# Altium PCB PCB.PcbDoc
Units mm, origin at the board's own origin, x right, y up, seen from the top; angles counter-clockwise.
Board outline 53 x 70 mm, 2 copper layers (Top Layer, Bottom Layer); 35 components, 28 nets, 144 pads, 30 vias.
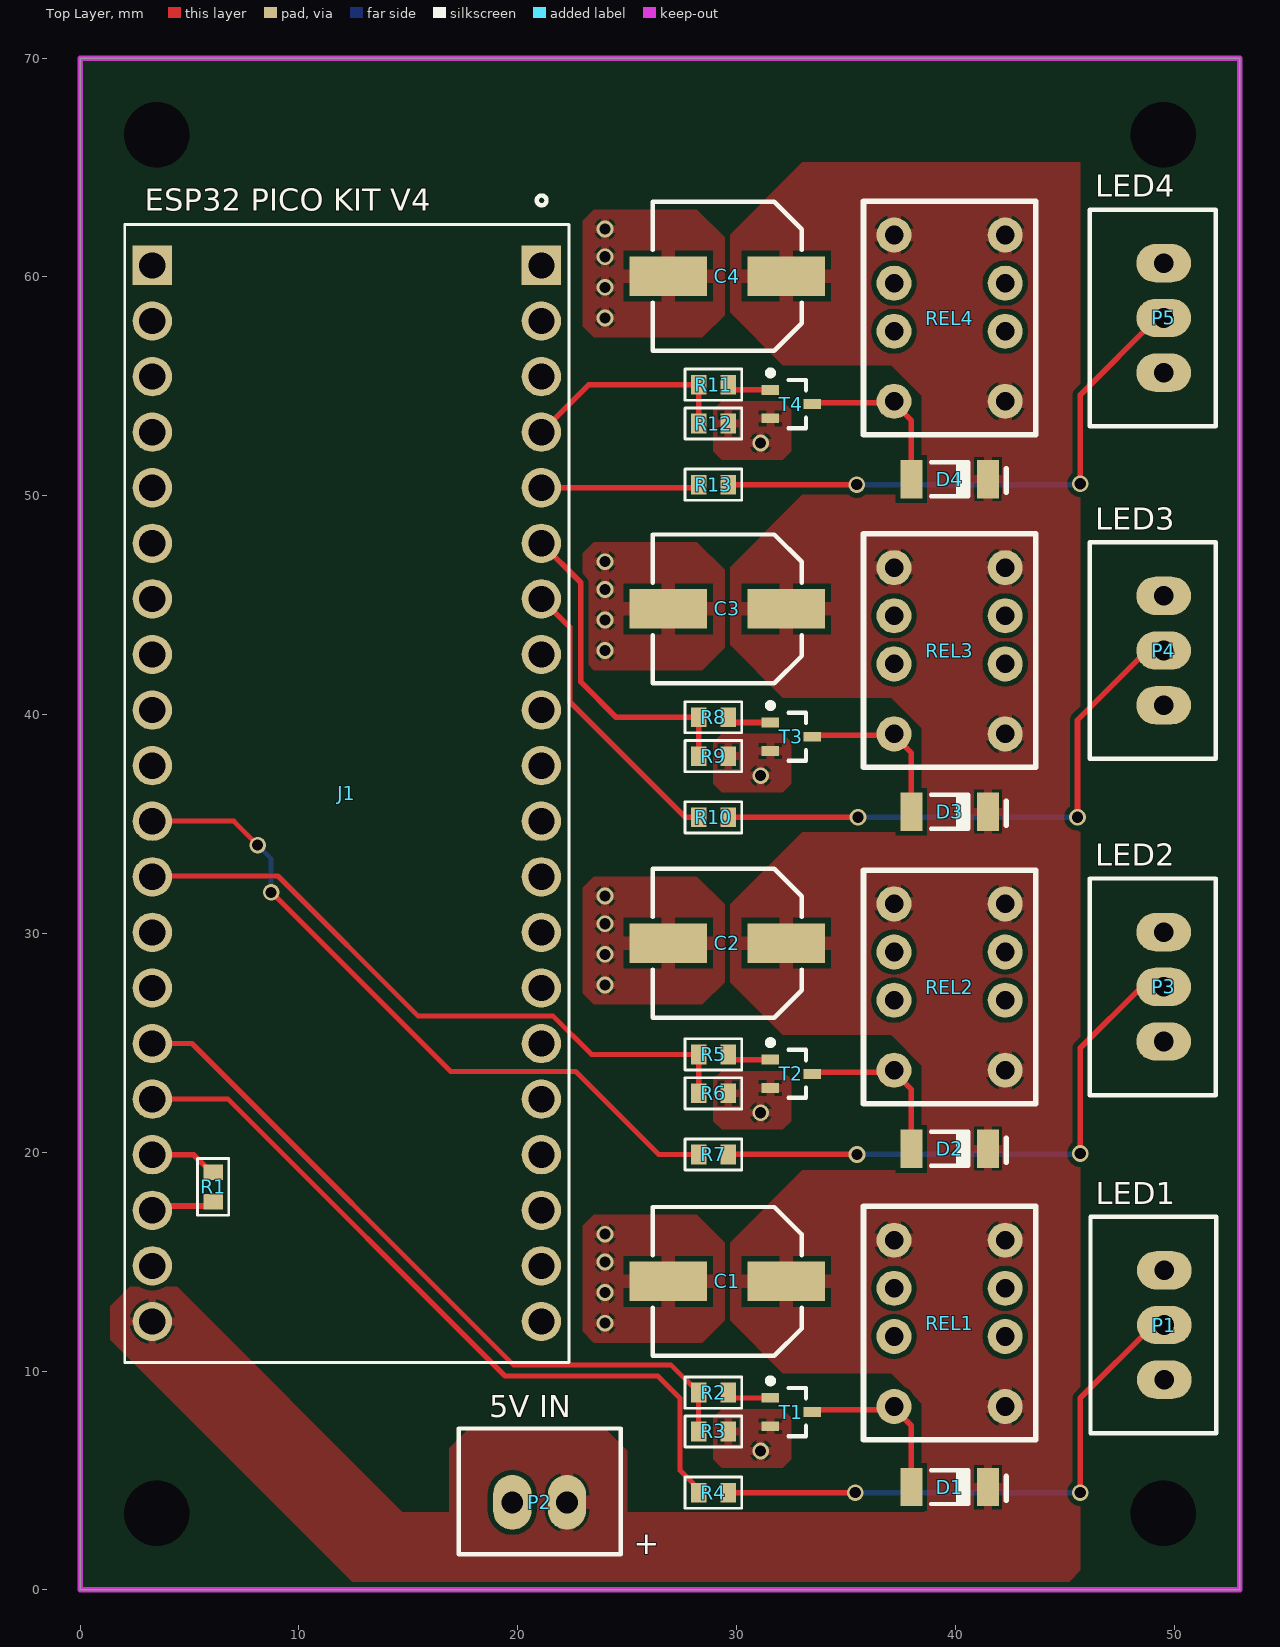
[diagram p0: Top Layer view]
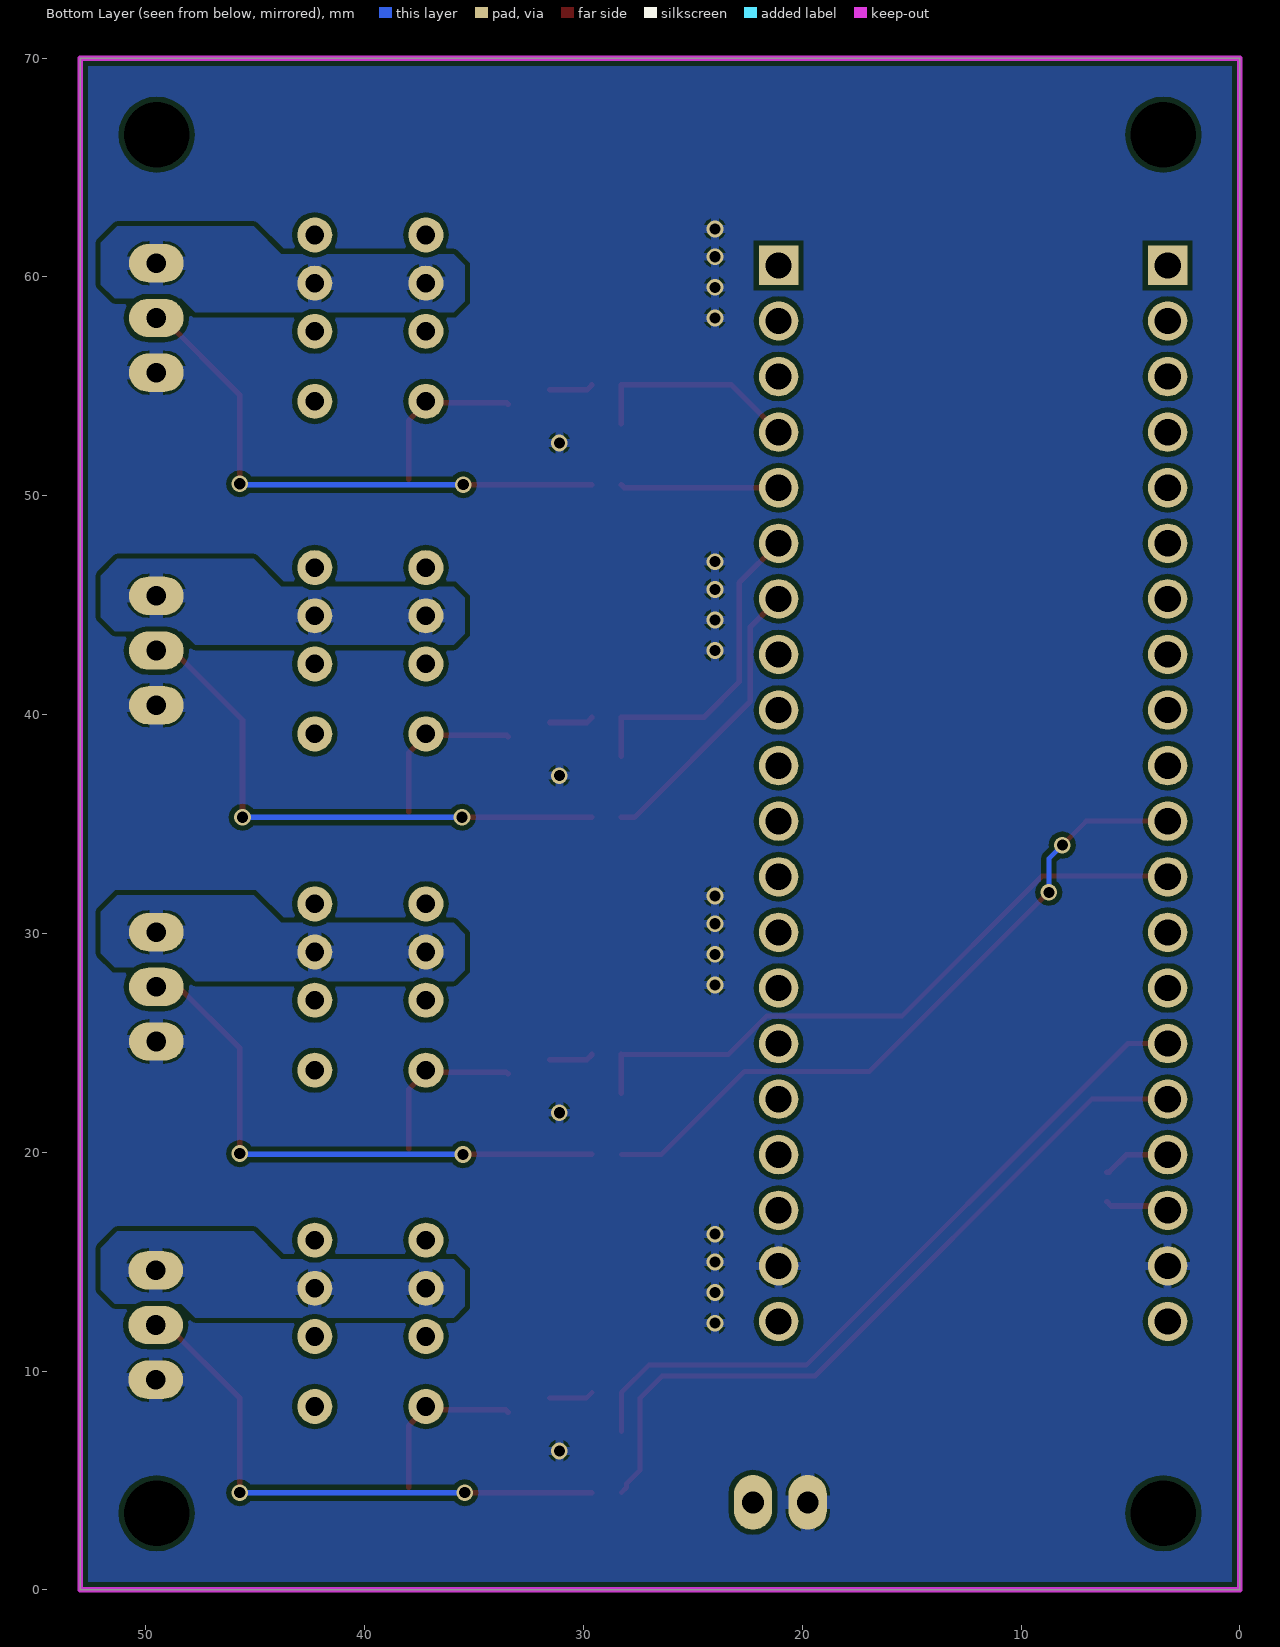
[diagram p1: Bottom Layer view, seen from below]

## Layer stack, top to bottom
Top Solder: solder mask 0.0102, Solder Resist, Dk 3.5
Top Layer: signal copper 0.0356
Dielectric 1: dielectric 0.32, FR-4, Dk 4.8
Bottom Layer: signal copper 0.0356
Bottom Solder: solder mask 0.0102, Solder Resist, Dk 3.5

## Board outline
0,0 0,70 53,70 53,0

## Design rules (kind name [scope] priority, off if disabled: settings)
BoardOutlineClearance [All] p1: gap=0.2 ignorepadtopadclearanceinfootprint=FALSE except(0.4: Arc-SplitBarrior Arc-SplitContinuation Track-SplitBarrior Track-SplitContinuation SMDPad-SplitBarrior SMDPad-SplitContinuation THPad-SplitBarrior THPad-SplitContinuation Via-SplitBarrior Via-SplitContinuation Fill-SplitBarrior Fill-SplitContinuation Poly-SplitBarrior Poly-SplitContinuation Region-SplitBarrior Region-SplitContinuation Text-SplitBarrior Text-SplitContinuation)
Clearance "Clearance Bottom Layer" [OnLayer('Bottom Layer')] p1: gap=0.203 ignorepadtopadclearanceinfootprint=TRUE except(0.254: Arc-Text Track-Text SMDPad-Text THPad-Text Via-Text Fill-Text Poly-Text Region-Text Text-Text)
Clearance "Clearance Top Layer" [OnLayer('Top Layer')] p2: gap=0.203 ignorepadtopadclearanceinfootprint=TRUE except(0.254: Arc-Text Track-Text SMDPad-Text THPad-Text Via-Text Fill-Text Poly-Text Region-Text Text-Text)
Clearance [All] p3: gap=0.2 ignorepadtopadclearanceinfootprint=FALSE except(0.089: Arc-Arc Arc-Track Arc-SMDPad Track-Track Track-SMDPad SMDPad-SMDPad; 0.127: Arc-Via Track-Via SMDPad-Via THPad-Via Via-Via; 0.254: Arc-Text Track-Text SMDPad-Text THPad-Text Via-Text Fill-Text Poly-Text Region-Text Text-Text)
HoleSize [All] p1: absolutevalues=TRUE maxlimit=6.3 minlimit=0.2 maxpercent=80.000 minpercent=20.000
MinimumAnnularRing [All] p1: minimumring=0.076
MinimumSolderMaskSliver [All] p1: minsoldermaskwidth=0.1
PolygonConnect PolygonConnect_1 [All] p1: thpad.connectstyle=Relief thpad.reliefconductorwidth=0.508 thpad.reliefentries=4 thpad.polygonreliefangle="90 Angle" thpad.airgapwidth=0.254 smdpad.connectstyle=Relief smdpad.reliefconductorwidth=0.508 smdpad.reliefentries=4 smdpad.polygonreliefangle="90 Angle" smdpad.airgapwidth=0.254 via.connectstyle=Direct via.reliefconductorwidth=0.508 via.reliefentries=4 via.polygonreliefangle="90 Angle" via.airgapwidth=0.254
RoutingCorners [All] p1: cornerstyle=Round minsetback=2.54 maxsetback=2.54
RoutingVias [All] p1: holewidth=0.5 width=1 viastyle="Through Hole" minholewidth=0.2 minwidth=0.45 maxholewidth=1 maxwidth=2
SilkToSilkClearance [All] p1: silktosilkclearance=0.1
SilkToSolderMaskClearance [IsPad] p1: minsilkscreentomaskgap=0.1 clearancetoexposedcopper=TRUE
SolderMaskExpansion [All] p1: expansion=0.102 istentingtop=FALSE
Width [All] p1: maxlimit=2.54 minlimit=0.089 preferedwidth=0.381
25 further rules are at their usual default settings.

## Components (designator, comment, footprint, x,y, rotation, side; value= is the part's Value field where it differs from the comment)
C1 "100uF" EM-Alu-Elco_6,3X8_SMD 29.576,14.097 r0 top
C2 "100uF" EM-Alu-Elco_6,3X8_SMD 29.576,29.551 r0 top
C3 "100uF" EM-Alu-Elco_6,3X8_SMD 29.576,44.831 r0 top
C4 "100uF" EM-Alu-Elco_6,3X8_SMD 29.576,60.031 r0 top
D1 "1N4148" "EM-SOD80C T1,5_SMD" 39.736,4.699 r180 top
D2 "1N4148" "EM-SOD80C T1,5_SMD" 39.736,20.153 r180 top
D3 "1N4148" "EM-SOD80C T1,5_SMD" 39.736,35.56 r180 top
D4 "1N4148" "EM-SOD80C T1,5_SMD" 39.736,50.76 r180 top
J1 "ESP32-PICO-KIT" XCVR_ESP32-PICO-KIT 12.191,36.397 r270 top
P1 "Pin Header 1X3P" "JST XH B3B-XH-A" 49.548,12.105 r270 top value="Pin Header 1x3P"
P2 "Pin Header 1X2P" "JST XH B2B-XH-A" 21,4 r180 top value="Pin Header 1x2P"
P3 "Pin Header 1X3P" "JST XH B3B-XH-A" 49.515,27.559 r270 top value="Pin Header 1x3P"
P4 "Pin Header 1X3P" "JST XH B3B-XH-A" 49.515,42.926 r270 top value="Pin Header 1x3P"
P5 "Pin Header 1X3P" "JST XH B3B-XH-A" 49.515,58.126 r270 top value="Pin Header 1x3P"
R1 "10K" "EM-0603-R T0,45_SMD" 6.081,18.415 r270 top
R2 "2K2" "EM-0603-R T0,45_SMD" 28.941,9.017 r0 top
R3 "22K" "EM-0603-R T0,45_SMD" 28.941,7.239 r0 top
R4 "470R" "EM-0603-R T0,45_SMD" 28.941,4.445 r0 top
R5 "2K2" "EM-0603-R T0,45_SMD" 28.941,24.471 r0 top
R6 "22K" "EM-0603-R T0,45_SMD" 28.941,22.693 r0 top
R7 "470R" "EM-0603-R T0,45_SMD" 28.941,19.899 r0 top
R8 "2K2" "EM-0603-R T0,45_SMD" 28.941,39.878 r0 top
R9 "22K" "EM-0603-R T0,45_SMD" 28.941,38.1 r0 top
R10 "470R" "EM-0603-R T0,45_SMD" 28.941,35.306 r0 top
R11 "2K2" "EM-0603-R T0,45_SMD" 28.941,55.078 r0 top
R12 "22K" "EM-0603-R T0,45_SMD" 28.941,53.3 r0 top
R13 "470R" "EM-0603-R T0,45_SMD" 28.941,50.506 r0 top
REL1 "AGQ2004H" "THC Relay AGQ" 39.736,12.192 r90 top
REL2 "AGQ2004H" "THC Relay AGQ" 39.736,27.559 r90 top
REL3 "AGQ2004H" "THC Relay AGQ" 39.736,42.926 r90 top
REL4 "AGQ2004H" "THC Relay AGQ" 39.736,58.126 r90 top
T1 "BC817" EM-SOT323_SMD 32.497,8.128 r0 top
T2 "BC817" EM-SOT323_SMD 32.497,23.582 r0 top
T3 "BC817" EM-SOT323_SMD 32.497,38.989 r0 top
T4 "BC817" EM-SOT323_SMD 32.497,54.189 r0 top

## Footprints (in the part's own frame and the unit in brackets; to place one, negate y for a bottom-side part, rotate by r counter-clockwise, add the part's x,y. Pads: shape width x height; smd on the part's side, far side on the other; paste and mask are expansions set on the pad)
"EM-0603-R T0,45_SMD" [mm] "Chip Resistor, 2-Leads, Body 1,55x0,85mm, IPC Medium Density"
  rect 0.7x0.9 smd: 1(-0.675,0) 2(0.675,0)
  silkscreen extent -1.3,-0.71 1.3,0.71, body extent -0.77,-0.43 0.77,0.43, height 0.45
EM-Alu-Elco_6,3X8_SMD [mm] "Aluminum Electrolytic Capacitor, Body 6,60x6,60x7,70mm, IPC Low Density"
  rect 3.55x1.8 smd: 1(2.7,0) 2(-2.7,0)
  silkscreen extent -3.4,-3.4 3.4,3.4, body extent -3.65,-3.4 3.65,3.4, height 7.7
"EM-SOD80C T1,5_SMD" [mm] "MELF Diode, 2-Leads, Body 3,50x1,53mm, IPC Medium Density"
  rect 1x1.75 smd: 1(-1.75,0) 2(1.75,0)
  silkscreen extent -2.59,-0.77 0.85,0.78, body extent -1.75,-0.76 1.75,0.76, height 1.53
EM-SOT323_SMD [mm] "SOTFL, 3-Leads, Body 2,00x2,10mm, Pitch 0,65mm, IPC Medium Density"
  rect 0.8x0.45 smd: 1(-0.95,0.65) 2(-0.95,-0.65) 3(0.95,0)
  silkscreen extent -1.07,-1.1 0.67,1.55, body extent -1.05,-1.1 1.05,1.1, height 1.1
"JST XH B2B-XH-A" [mm]
  oval 1.75x2.5 hole 1: 1(-1.25,0) 2(1.25,0)
  silkscreen extent -3.7,-3.38 3.7,2.38, body extent -3.7,-3.38 3.7,2.38, height 7
"JST XH B3B-XH-A" [mm]
  oval 1.75x2.5 hole 0.9: 1(-2.5,0) 2(0,0) 3(2.5,0)
  silkscreen extent -4.95,-3.38 4.95,2.38, body extent -4.95,-3.38 4.95,2.38, height 7
"THC Relay AGQ" [mm] "AGQ Series - Trough Hole"
  round 1.6 hole 0.85 mask+0.102: 1(-3.81,-2.54) 2(-0.61,-2.54) 3(1.59,-2.54) 4(3.79,-2.54) 5(3.79,2.54) 6(1.59,2.54) 7(-0.61,2.54) 8(-3.81,2.54)
  silkscreen extent -5.33,-3.94 5.33,3.94, body extent -5,-3 5,3, height 5.4
XCVR_ESP32-PICO-KIT [mm]
  rect 1.8x1.8 hole 1.2: J2_1(-24.13,8.89) J3_1(-24.13,-8.89)
  round 1.8 hole 1.2: J2_2(-21.59,8.89) J2_3(-19.05,8.89) J2_4(-16.51,8.89) J2_5(-13.97,8.89) J2_6(-11.43,8.89) J2_7(-8.89,8.89) J2_8(-6.35,8.89) J2_9(-3.81,8.89) J2_10(-1.27,8.89) J2_11(1.27,8.89) J2_12(3.81,8.89) J2_13(6.35,8.89) J2_14(8.89,8.89) J2_15(11.43,8.89) J2_16(13.97,8.89) J2_17(16.51,8.89) J2_18(19.05,8.89) J2_19(21.59,8.89) J2_20(24.13,8.89) J3_2(-21.59,-8.89) J3_3(-19.05,-8.89) J3_4(-16.51,-8.89) J3_5(-13.97,-8.89) J3_6(-11.43,-8.89) J3_7(-8.89,-8.89) J3_8(-6.35,-8.89) J3_9(-3.81,-8.89) J3_10(-1.27,-8.89) J3_11(1.27,-8.89) J3_12(3.81,-8.89) J3_13(6.35,-8.89) J3_14(8.89,-8.89) J3_15(11.43,-8.89) J3_16(13.97,-8.89) J3_17(16.51,-8.89) J3_18(19.05,-8.89) J3_19(21.59,-8.89) J3_20(24.13,-8.89)
  silkscreen extent -27.32,-10.15 26,10.15, body extent -25.65,-10.14 25.65,10.14, height 8.55

## Part data
C1 C2 C3 C4: library part "Capacitor Elco", "Capacitor Elco"
D1 D2 D3 D4: library part Diode, "Diode"
J1: "- Transceiver; 802.11 b/g/n _Wi-Fi, WiFi, WLAN_, BluetoothÂ® Smart Ready 4.x Dual Mode For Use With ESP32-PICO-D4", Package=None, Availability=Unavailable, MF="Espressif Systems", MP=ESP32-PICO-KIT, Price=None, SnapEDA_Link=https://www.snapeda.com/parts/ESP32-PICO-KIT/Espressif%20Systems/view-part/2777057/?ref=snap
P1 P3 P4 P5: library part "Header 3", "Header 3-Pin", Manufacturer Name="Wurth Elektronik", Manufacturer Part No.=61300311121, Supplier 1="Wurth Elektronik", Supplier Part Number 1=61300311121, Supplier Unit Price 1=0.1, Type="Pin Header 1x3P"
P2: library part "Header 2", "Header 2-Pin", Manufacturer Name="Wurth Elektronik", Manufacturer Part No.=61300211121, Supplier 1="Wurth Elektronik", Supplier Part Number 1=61300211121, Supplier Unit Price 1=0.1, Type="Pin Header 1x2P"
R1 R2 R3 R4 R5 R6 R7 R8 R9 R10 R11 R12 R13: library part Resistor, "Resistor"
REL1 REL2 REL3 REL4: library part "Relay AGQ2004H", "AGQ2004H -  Signal Relay, 4.5 VDC, DPDT, 2 A, Through Hole, Non Latching, AGQ Series", Manufacturer Name=Panasonic, Manufacturer Part No.=TX2-4.5V, Max. Contact Current=2A, Operating Current=31mA, Supplier Part Number 1=3104813, Rcoil=145R, Supplier 1=Farnell, Supplier Unit Price 1=3.97, Type=AGQ2004H
T1 T2 T3 T4: library part "Transistor BC817 (Small)", "BC817 -  Bipolar (BJT) Single Transistor, NPN, 45 V, 170 MHz, 300 mW, 500 mA, 100 hFE", Manufacturer Name=Nexperia, Manufacturer Part No.=BC817W,115, Nominal Current=500mA, Rating=300mW, Supplier Part Number 1=2114873, Gain hFE=100, Max. Vce=45V, Supplier 1=Farnell, Supplier Unit Price 1=0.045, Type=BC817

## Free pads (board coordinates)
  round 1.524 hole 3 unplated: 1(3.5,3.5) 1(3.5,66.5) 1(49.5,66.5) 1(49.5,3.5)

## Via types
v1: diameter 0.762, hole 0.508, Top Layer to Bottom Layer, 30 vias

## Nets (pads, with @x,y where several pads share a name; then routed paths per layer and width w, separated by ;. In a path a pad name is that pad's centre, name@x,y a point inside that pad or via, vN(x,y) a via of type N, cw(c..) or ccw(c..) an arc to the next point about the centre after c; other vN are vias at no path point)
3V3: J1.J3_18 R1.2 | length 2.9
  Top Layer w0.254: J1.J3_18 3.497,17.544 5.884,17.544 R1.2
5V: C1.1 C2.1 C3.1 C4.1 D1.1 D2.1 D3.1 D4.1 J1.J3_20 P2.1 REL1.1 REL1.4 REL1.5 REL2.1 REL2.4 REL2.5 REL3.1 REL3.4 REL3.5 REL4.1 REL4.4 REL4.5
GND: C1.2 C2.2 C3.2 C4.2 J1.J2_19 J1.J3_19 P1.3 P2.2 P3.3 P4.3 P5.3 R3.2 R6.2 R9.2 R12.2 T1.2 T2.2 T3.2 T4.2
  other v1: 31.1,6.35 23.988,12.192 23.988,13.589 23.988,14.986 23.988,16.256 31.1,21.804 23.988,27.646 23.988,29.043 23.988,30.44 23.988,31.71 31.1,37.211 23.988,42.926 23.988,44.323 23.988,45.72 23.988,46.99 31.1,52.411 23.988,58.126 23.988,59.523 23.988,60.92 23.988,62.19
NetD1_2: D1.2 REL1.8 T1.3 | length 7.9
  Top Layer w0.254: T1.3 33.545,8.226 37.04,8.226 REL1.8 37.196,8.292 37.986,7.502 D1.2
NetD2_2: D2.2 REL2.8 T2.3 | length 7.7
  Top Layer w0.254: T2.3 33.53,23.666 37.112,23.666 REL2.8 37.196,23.659 37.986,22.869 D2.2
NetD3_2: D3.2 REL3.8 T3.3 | length 7.7
  Top Layer w0.254: T3.3 33.51,39.053 37.132,39.053 REL3.8 37.196,39.026 37.986,38.236 D3.2
NetD4_2: D4.2 REL4.8 T4.3 | length 7.7
  Top Layer w0.254: T4.3 33.51,54.253 37.132,54.253 REL4.8 37.196,54.226 37.986,53.436 D4.2
NetJ1_J2_4: J1.J2_4 R11.1 R12.1 | length 9.9
  Top Layer w0.254: J1.J2_4 23.252,55.078 R11.1 R12.1
NetJ1_J2_5: J1.J2_5 R13.1 | length 7.2
  Top Layer w0.254: J1.J2_5 28.127,50.367 R13.1
NetJ1_J2_6: J1.J2_6 R8.1 R9.1 | length 14.9
  Top Layer w0.254: J1.J2_6 22.882,46.026 22.882,41.492 24.496,39.878 R8.1 R9.1
NetJ1_J2_7: J1.J2_7 R10.1 | length 13.3
  Top Layer w0.254: J1.J2_7 22.374,43.994 22.374,40.603 27.671,35.306 R10.1
NetJ1_J3_11: J1.J3_11 R7.1 | length 32.2
  Top Layer w0.229: J1.J3_11 7.022,35.127 v1(8.113,34.036) ; v1(8.732,31.877) 8.748,31.877 16.926,23.699 22.641,23.699 26.441,19.899 R7.1
  Bottom Layer w0.229: v1(8.113,34.036) 8.732,33.417 v1(8.732,31.877)
NetJ1_J3_12: J1.J3_12 R5.1 R6.1 | length 30.1
  Top Layer w0.229: J1.J3_12 3.34,32.626 9.042,32.626 15.433,26.235 21.606,26.235 23.371,24.471 R5.1
  Top Layer w0.254: R6.1 R5.1
NetJ1_J3_15: J1.J3_15 R2.1 R3.1 | length 33.3
  Top Layer w0.229: J1.J3_15 5.117,24.967 19.797,10.287 26.996,10.287 R2.1 R3.1
NetJ1_J3_16: J1.J3_16 R4.1 | length 34.4
  Top Layer w0.229: J1.J3_16 6.768,22.427 19.416,9.779 26.401,9.779 27.417,8.763 27.417,5.461 28.03,4.848 28.03,4.681 R4.1
NetJ1_J3_17: J1.J3_17 R1.1 | length 3.1
  Top Layer w0.254: J1.J3_17 5.184,19.887 5.981,19.09 R1.1
NetP1_1: P1.1 REL1.3 REL1.6
NetP1_2: P1.2 R4.2 | length 25.6
  Top Layer w0.254: R4.2 v1(35.423,4.445) ; v1(45.705,4.445) 45.705,8.763 49.047,12.105 P1.2
  Bottom Layer w0.254: v1(35.423,4.445) v1(45.705,4.445)
NetP3_1: P3.1 REL2.3 REL2.6
NetP3_2: P3.2 R7.2 | length 25.9
  Top Layer w0.254: R7.2 v1(35.506,19.899) ; v1(45.705,19.939) 45.705,24.765 48.499,27.559 P3.2
  Bottom Layer w0.254: v1(35.506,19.899) 45.665,19.899 v1(45.705,19.939)
NetP4_1: P4.1 REL3.3 REL3.6
NetP4_2: P4.2 R10.2 | length 25.7
  Top Layer w0.254: R10.2 v1(35.545,35.306) ; v1(45.578,35.306) 45.578,39.751 48.753,42.926 P4.2
  Bottom Layer w0.254: v1(35.545,35.306) v1(45.578,35.306)
NetP5_1: P5.1 REL4.3 REL4.6
NetP5_2: P5.2 R13.2 | length 25.4
  Top Layer w0.254: R13.2 v1(35.49,50.506) ; v1(45.705,50.546) 45.705,54.61 49.221,58.126 P5.2
  Bottom Layer w0.254: v1(35.49,50.506) 45.665,50.506 v1(45.705,50.546)
NetR2_2: R2.2 T1.1 | length 2
  Top Layer w0.229: R2.2 29.616,9.014 29.852,8.778 T1.1
NetR5_2: R5.2 T2.1 | length 2
  Top Layer w0.254: R5.2 29.616,24.455 29.839,24.232 T2.1
NetR8_2: R8.2 T3.1 | length 2
  Top Layer w0.254: R8.2 29.616,39.862 29.839,39.639 T3.1
NetR11_2: R11.2 T4.1 | length 2
  Top Layer w0.254: R11.2 29.616,55.062 29.839,54.839 T4.1
pads on no net: J1.J2_1 J1.J2_2 J1.J2_3 J1.J2_8 J1.J2_9 J1.J2_10 J1.J2_11 J1.J2_12 J1.J2_13 J1.J2_14 J1.J2_15 J1.J2_16 J1.J2_17 J1.J2_18 J1.J2_20 J1.J3_1 J1.J3_2 J1.J3_3 J1.J3_4 J1.J3_5 J1.J3_6 J1.J3_7 J1.J3_8 J1.J3_9 J1.J3_10 J1.J3_13 J1.J3_14 REL1.2 REL1.7 REL2.2 REL2.7 REL3.2 REL3.7 REL4.2 REL4.7
copper on no net: | length 0

## Polygon pours and split planes (outlines as drawn)
5V on Top Layer "5V_L01_P019" (solid, pour order 19): 16.876,3.556 16.876,6.477 17.765,7.366 23.988,7.366 25.004,6.35 25.004,3.556 45.705,3.556 45.705,0.889 45.197,0.381 12.431,0.381 12.304,0.508 1.382,11.43 1.382,12.954 2.271,13.843 4.43,13.843 14.717,3.556
5V on Top Layer "5V_L01_P018" (solid, pour order 18): 38.466,49.617 38.466,54.57 37.069,55.967 32.116,55.967 29.703,58.38 29.703,61.936 33.005,65.238 45.705,65.238 45.705,49.617 45.324,49.236 38.847,49.236
5V on Top Layer "5V_L01_P017" (solid, pour order 17): 38.466,34.417 38.466,39.37 37.069,40.767 32.116,40.767 29.703,43.18 29.703,46.736 33.005,50.038 45.705,50.038 45.705,34.417 45.324,34.036 38.847,34.036
5V on Top Layer "5V_L01_P016" (solid, pour order 16): 38.466,19.01 38.466,23.963 37.069,25.36 32.116,25.36 29.703,27.773 29.703,31.329 33.005,34.631 45.705,34.631 45.705,19.01 45.324,18.629 38.847,18.629
5V on Top Layer "5V_L01_P012" (solid, pour order 12): 38.466,3.556 38.466,8.509 37.069,9.906 32.116,9.906 29.703,12.319 29.703,15.875 33.005,19.177 45.705,19.177 45.705,3.556 45.324,3.175 38.847,3.175
GND on Top Layer "GND_L01_P006" (solid, pour order 6): 23.48,42.037 22.972,42.545 22.972,47.371 23.48,47.879 28.179,47.879 29.449,46.609 29.449,43.053 28.433,42.037
GND on Top Layer "GND_L01_P007" (solid, pour order 7): 23.48,57.237 22.972,57.745 22.972,62.571 23.48,63.079 28.179,63.079 29.449,61.809 29.449,58.253 28.433,57.237
GND on Top Layer "GND_L01_P005" (solid, pour order 5): 23.48,26.757 22.972,27.265 22.972,32.091 23.48,32.599 28.179,32.599 29.449,31.329 29.449,27.773 28.433,26.757
GND on Top Layer "GND_L01_P004" (solid, pour order 4): 23.48,11.303 22.972,11.811 22.972,16.637 23.48,17.145 28.179,17.145 29.449,15.875 29.449,12.319 28.433,11.303
GND on Top Layer "GND_L01_P003" (solid, pour order 3): 28.941,53.935 29.322,54.316 32.116,54.316 32.497,53.935 32.497,52.03 32.116,51.649 29.322,51.649 28.941,52.03
GND on Top Layer "GND_L01_P002" (solid, pour order 2): 28.941,38.735 29.322,39.116 32.116,39.116 32.497,38.735 32.497,36.83 32.116,36.449 29.322,36.449 28.941,36.83
GND on Top Layer "GND_L01_P001" (solid, pour order 1): 28.941,23.328 29.322,23.709 32.116,23.709 32.497,23.328 32.497,21.423 32.116,21.042 29.322,21.042 28.941,21.423
GND on Top Layer "GND_L01_P000" (solid, pour order 0): 28.941,7.874 29.322,8.255 32.116,8.255 32.497,7.874 32.497,5.969 32.116,5.588 29.322,5.588 28.941,5.969
GND on Bottom Layer "GND_L02_P020" (solid, pour order 20): 0,0 0,70 53,70 53,0
NetP5_1 on Bottom Layer "NETP5_1_L02_P011" (solid, pour order 11): 35.418,60.539 35.926,61.047 43.8,61.047 45.07,62.317 51.293,62.317 52.055,61.555 52.055,59.65 51.42,59.015 48.372,59.015 47.737,58.38 35.926,58.38 35.418,58.888
NetP4_1 on Bottom Layer "NETP4_1_L02_P010" (solid, pour order 10): 35.418,45.339 35.926,45.847 43.8,45.847 45.07,47.117 51.293,47.117 52.055,46.355 52.055,44.45 51.42,43.815 48.372,43.815 47.737,43.18 35.926,43.18 35.418,43.688
NetP3_1 on Bottom Layer "NETP3_1_L02_P009" (solid, pour order 9): 35.418,29.972 35.926,30.48 43.8,30.48 45.07,31.75 51.293,31.75 52.055,30.988 52.055,29.083 51.42,28.448 48.372,28.448 47.737,27.813 35.926,27.813 35.418,28.321
NetP1_1 on Bottom Layer "NETP1_1_L02_P008" (solid, pour order 8): 35.418,14.605 35.926,15.113 43.8,15.113 45.07,16.383 51.293,16.383 52.055,15.621 52.055,13.716 51.42,13.081 48.372,13.081 47.737,12.446 35.926,12.446 35.418,12.954

## Keep-outs
Keep-Out Layer:
  the board outline again, w0.254

## Silkscreen, mask and mechanical layers (free items; w line width, h text height)
Top Overlay:
  text "LED4" at 46.38,63.652 h1.02
  text "ESP32 PICO KIT V4" at 2.946,63.017 h1.02
  text "LED3" at 46.38,48.452 h1.02
  text "LED2" at 46.38,33.085 h1.02
  text "LED1" at 46.413,17.631 h1.02
  text "5V IN" at 18.694,7.899 h1.02
  text "+" at 25.298,1.634 h1.02